# Altium PCB SmartUrometer_PCB.PcbDoc
Units mm, origin at the board's own origin, x right, y up, seen from the top; angles counter-clockwise.
Board outline 89.03 x 65.02 mm, 2 copper layers (Top Layer, Bottom Layer); 7 components, 8 nets, 56 pads, 4 vias.
Unrouted connection lines stored in the file: 2.
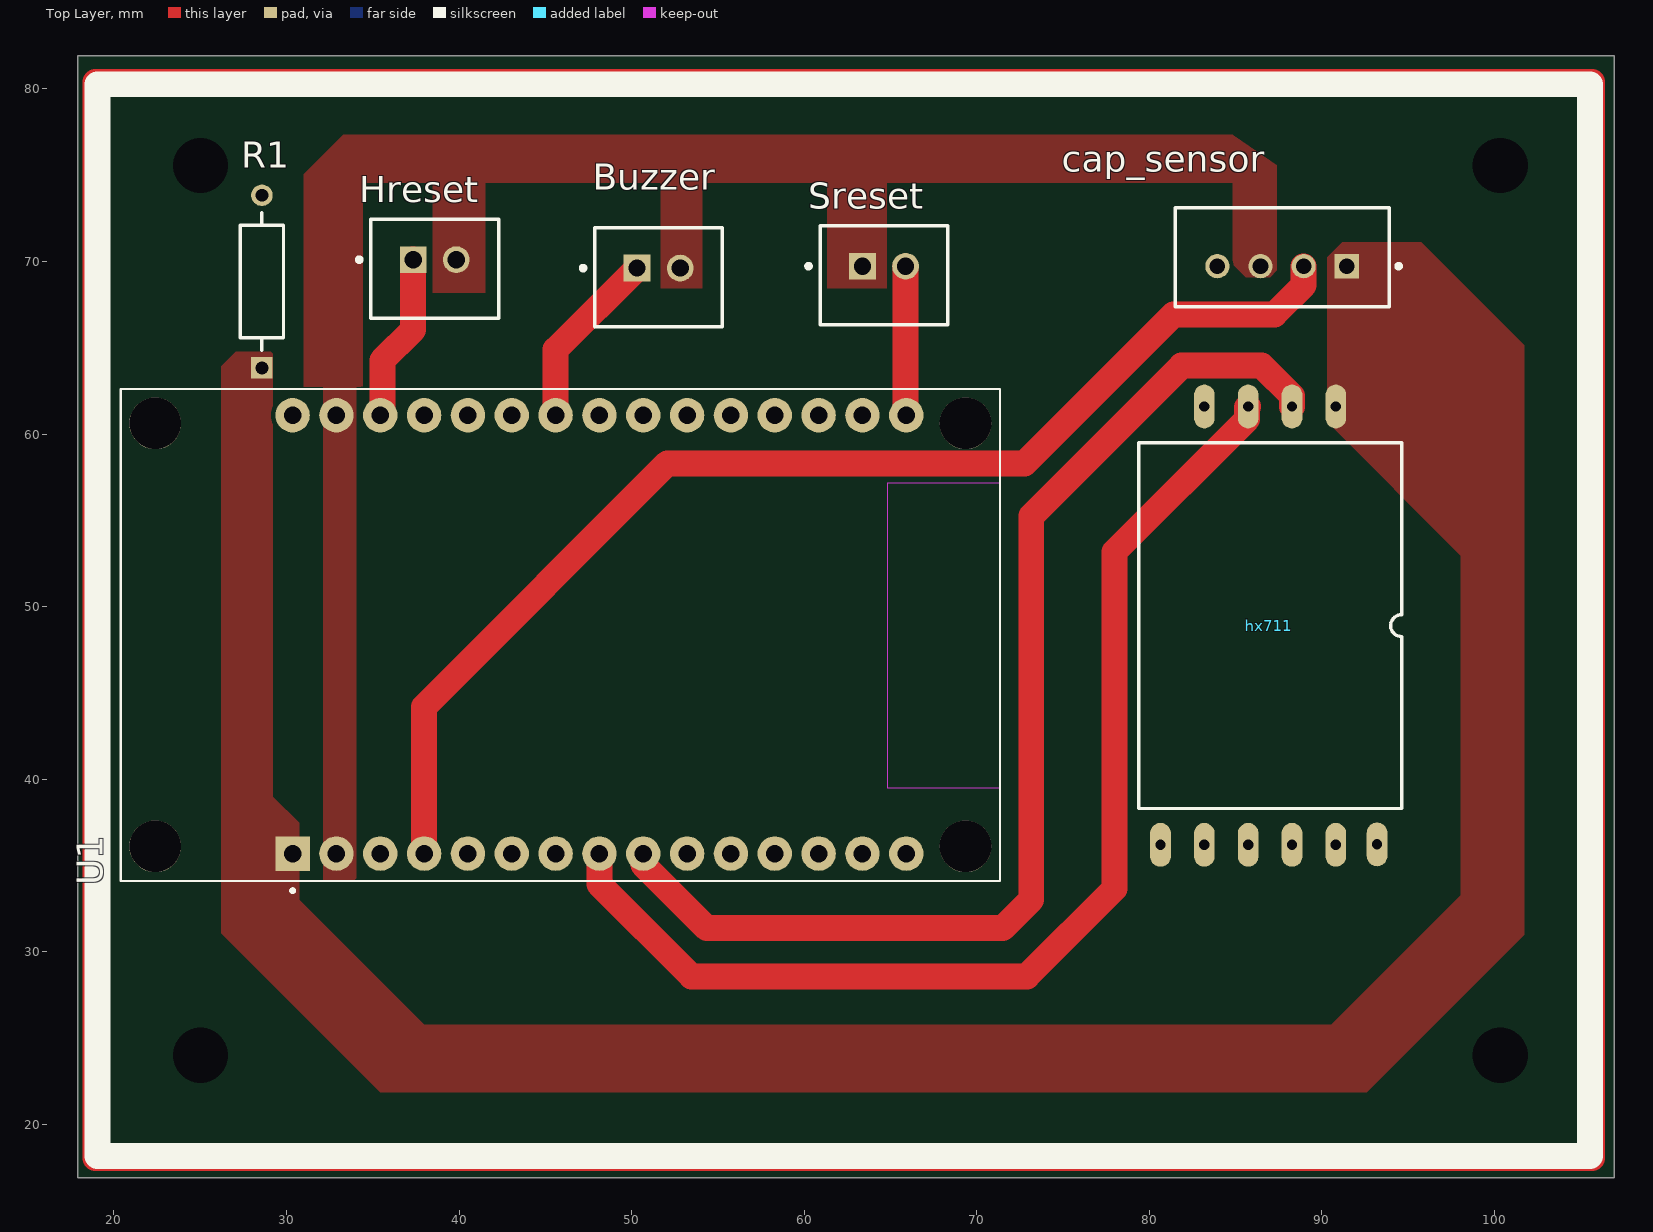
[diagram p0: Top Layer view]
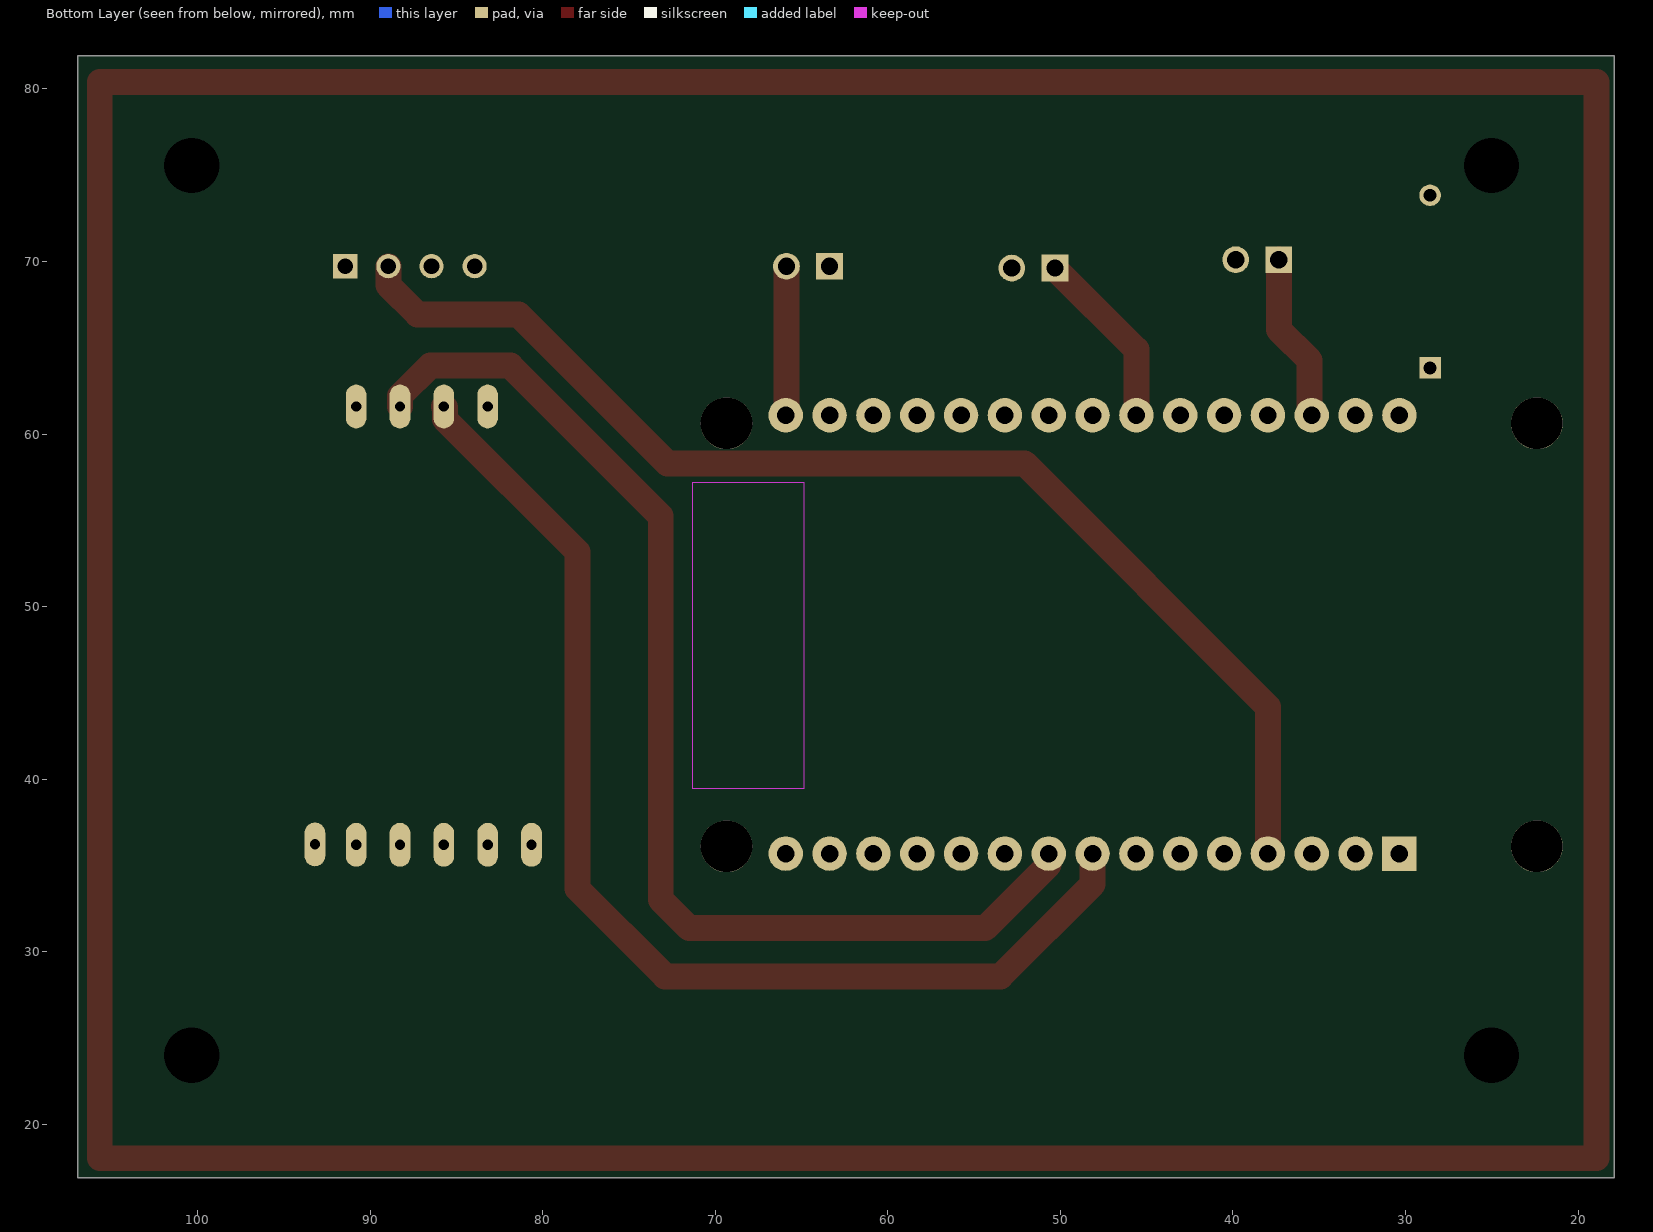
[diagram p1: Bottom Layer view, seen from below]
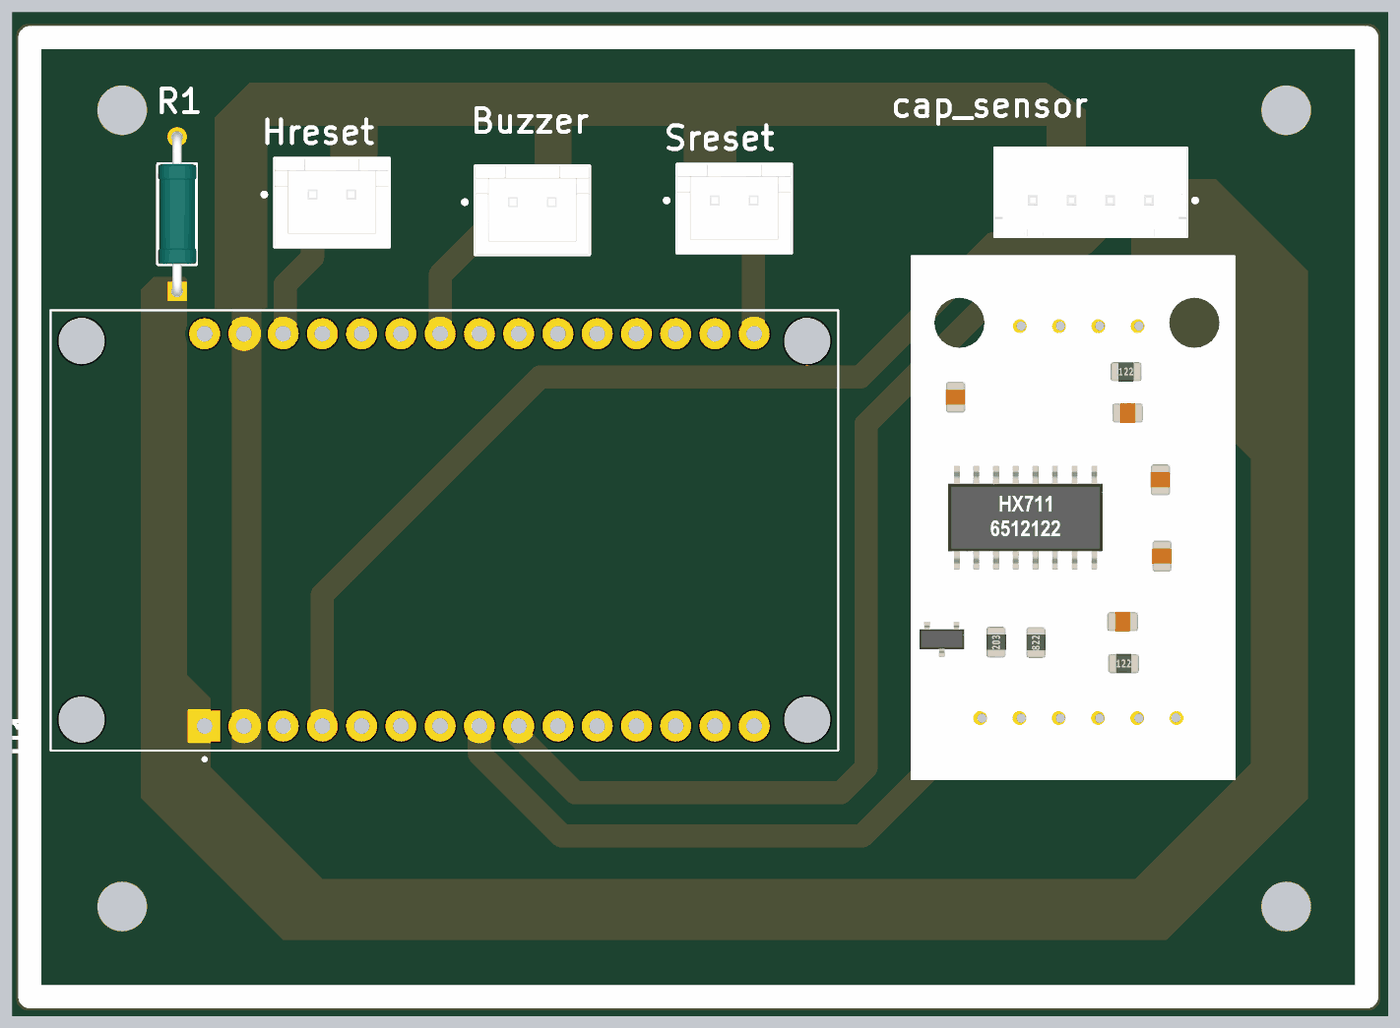
[diagram p2: 3D render of the assembled board from above, using the file's embedded part models]

## Layer stack, top to bottom
Top Solder: solder mask 0.0102, Solder Resist, Dk 3.5
Top Layer: signal copper 0.0356
Dielectric 1: dielectric 0.32, FR-4, Dk 4.8
Bottom Layer: signal copper 0.0356
Bottom Solder: solder mask 0.0102, Solder Resist, Dk 3.5

## Board outline
17.907,16.891 106.934,16.891 106.934,81.915 17.907,81.915

## Design rules (kind name [scope] priority, off if disabled: settings)
Clearance Clearance_1 [OnMid vs OnMid] p1: gap=0.254 ignorepadtopadclearanceinfootprint=FALSE sourcerule=37 cellrowname=All cellrowtype=0 cellcolname=All cellcoltype=0 innerlayers=TRUE
Clearance Clearance_2 [(ExistsOnLayer('Top Layer') Or ExistsOnLayer('Bottom Layer')) vs (ExistsOnLayer('Top Layer') Or ExistsOnLayer('Bottom Layer'))] p2: gap=0.254 ignorepadtopadclearanceinfootprint=FALSE sourcerule=37 cellrowname=All cellrowtype=0 cellcolname=All cellcoltype=0 outerlayers=TRUE
Clearance [All] p3: gap=0.254 ignorepadtopadclearanceinfootprint=FALSE ismatrix=TRUE
PolygonConnect PolygonConnect_1 [All vs IsPolygon] p1: connectstyle=Direct reliefconductorwidth=0.254 reliefentries=4 polygonreliefangle="90 Angle" airgapwidth=0.254
PolygonConnect [All] p2: connectstyle=Relief reliefconductorwidth=0.254 reliefentries=4 polygonreliefangle="90 Angle" airgapwidth=0.254
RoutingVias [All] p1: holewidth=0.711 width=1.27 viastyle="Through Hole" minholewidth=0.711 minwidth=1.27 maxholewidth=0.711 maxwidth=1.27
SolderMaskExpansion [All] p1: expansion=0.102 istentingtop=FALSE
Width [All] p1: maxlimit=1.5 minlimit=1.5 preferedwidth=1.5 minimp=50.000000 maximp=50.000000 favimp=50.000000
30 further rules are at their usual default settings.

## Classes and differential pairs
component class Sheet1: Buzzer cap_sensor Hreset hx711 R1 Sreset

## Components (designator, comment, footprint, x,y, rotation, side; value= is the part's Value field where it differs from the comment)
Buzzer "Buzzer" FP-B2B-XH-A_LF_SN-MFG 51.562,69.088 r0 top
cap_sensor "B4B-XH-A(LF)(SN)" FP-B4B-XH-A_LF_SN-MFG 87.69,70.248 r0 top
Hreset "B2B-XH-A(LF)(SN)" FP-B2B-XH-A_LF_SN-MFG 38.588,69.579 r0 top
hx711 "HX711" hX711 93.345,61.595 r270 top
R1 "MRS25000C1000FRP00" FP-MRS25-MFG 28.575,68.834 r90 top
Sreset "B2B-XH-A(LF)(SN)" FP-B2B-XH-A_LF_SN-MFG 64.623,69.198 r0 top
U1 "ESP32-DEVKIT-V1" MODULE_ESP32_DEVKIT_V1 45.868,48.387 r90 top

## Footprints (in the part's own frame and the unit in brackets; to place one, negate y for a bottom-side part, rotate by r counter-clockwise, add the part's x,y. Pads: shape width x height; smd on the part's side, far side on the other; paste and mask are expansions set on the pad)
FP-B2B-XH-A_LF_SN-MFG [mm]
  rect 1.55x1.55 hole 1 paste-2539.97 mask+0: 1(-1.25,0.525)
  round 1.55 hole 1 paste-2539.97 mask+0: 2(1.25,0.525)
  silkscreen extent -4.5,-2.87 3.7,2.88, body extent -3.8,-2.98 3.8,2.98, height 0.25
FP-B4B-XH-A_LF_SN-MFG [mm]
  rect 1.4x1.4 hole 0.9 paste-2539.97 mask+0: 1(3.75,-0.525)
  round 1.4 hole 0.9 paste-2539.97 mask+0: 2(1.25,-0.525) 3(-1.25,-0.525) 4(-3.75,-0.525)
  silkscreen extent -6.2,-2.87 6.87,2.88, body extent -6.3,-2.98 6.3,2.98, height 0.25
FP-MRS25-MFG [mm]
  rect 1.25x1.25 hole 0.75 paste-2539.97 mask+0: 1(-5,0)
  round 1.25 hole 0.75 paste-2539.97 mask+0: 2(5,0)
  silkscreen extent -3.97,-1.25 3.97,1.25, body extent -5.73,-1.35 5.73,1.35, height 0.25
hX711 [mm]
  oval 2.54x1.2 hole 0.6: 0(25.4,-12.7) 1(25.4,-10.16) 2(25.4,-7.62) 3(25.4,-5.08) 4(25.4,-2.54) 5(25.375,-0.152) 6(0,-10.16) 7(0,-7.62) 8(0,-5.08) 9(0,-2.54)
  silkscreen extent 2.1,-13.97 23.3,1.27, body extent -4.58,-17.3 29.42,3.7, height 1.97
MODULE_ESP32_DEVKIT_V1 [mm]
  rect 2x2 / inner round 2 / far side rect 2x2 hole 1.02: 1(-12.7,15.515)
  round 2 hole 1.02: 2(-12.7,12.975) 3(-12.7,10.435) 4(-12.7,7.895) 5(-12.7,5.355) 6(-12.7,2.815) 7(-12.7,0.275) 8(-12.7,-2.265) 9(-12.7,-4.805) 10(-12.7,-7.345) 11(-12.7,-9.885) 12(-12.7,-12.425) 13(-12.7,-14.965) 14(-12.7,-17.505) 15(-12.7,-20.045) 16(12.7,-20.045) 17(12.7,-17.505) 18(12.7,-14.965) 19(12.7,-12.425) 20(12.7,-9.885) 21(12.7,-7.345) 22(12.7,-4.805) 23(12.7,-2.265) 24(12.7,0.275) 25(12.7,2.815) 26(12.7,5.355) 27(12.7,7.895) 28(12.7,10.435) 29(12.7,12.975) 30(12.7,15.515)
  round 3 hole 3 unplated: ""(-12.28,23.475) ""(-12.28,-23.475) ""(12.23,23.475) ""(12.23,-23.475)
  Keep-Out Layer region: 8.78,-25.475 -8.91,-25.475 -8.91,-18.985 8.78,-18.985
  Keep-Out Layer region: 8.78,-25.475 -8.91,-25.475 -8.91,-18.985 8.78,-18.985
  silkscreen extent -14.95,-25.48 14.23,25.48

## Part data
Buzzer Hreset Sreset: library part CMP-2000-05888-3, "CONN HEADER VERT 2POS 2.5MM", Color=Natural, Contact Resistance=20mR, Current Rating=3A, Housing Color=White, Insulation Resistance=1GR, Max Operating Temperature=85°C, Max Voltage Rating (AC)=250V, Min Operating Temperature=-25°C, Connector Type="Male Pin", Contact Material=Brass, Contact Plating=Tin, Contact Type="Male Pin", Depth=5.75mm, Fastening Type=Detent, Housing Material=Polyamide, Lead Free="Lead Free", Lead Pitch=2.5mm, Length=7.4mm, Max Current Rating=3A, Max Voltage Rating (DC)=250V, Mount="Through Hole", Number of Contacts=2, Number of Positions=2, Number of Rows=1, Orientation=Straight, Packaging=Bulk, Pitch=2.5mm, REACH SVHC="No SVHC", Series=XH, Termination=Solder, Voltage Rating=250V, Voltage Rating (AC)=250V, Wire/Cable Gauge=22AWG
cap_sensor: library part CMP-17439-000250-1, "CONN HEADER VERT 4POS 2.5MM", Color=Natural, Contact Resistance=20mR, Current Rating=3A, Flammability Rating="UL94 V-0", Housing Color=White, Insulation Resistance=1GR, Max Operating Temperature=85°C, Max Voltage Rating (AC)=250V, Min Operating Temperature=-25°C, Package Quantity=500, Connector Type=Header, Contact Finish - Mating=TIN, Contact Material=Brass, Contact Plating=Tin, Contact Shape=Square, Contact Type="Male Pin", Depth=5.75mm, Fastening Type=Detent, Gender=Male, Housing Material=Polyamide, Insulation Color=Natural, Insulation Material=Nylon, Lead Free="Lead Free", Lead Pitch=2.5mm, Length=12.4mm, Mated Stacking Heights=9.8mm, Material=Polyamide, Max Current Rating=3A, Max Voltage Rating (DC)=250V, Mount="Through Hole", Number of Contacts=4, Number of Positions=4, Number of Rows=1, Orientation=Straight, Packaging=Bulk, Pitch=2.5mm, REACH SVHC="No SVHC", Series=XH, Termination=Solder, Voltage Rating=250V, Voltage Rating (AC)=250V, Wire/Cable Gauge=22AWG
R1: library part CMP-00030-42757237-1, "MRS25000C1000FRP00 Resistor, 100 Ohm, ± 1%, 600 mW, Axial Leaded, Metal Film (Thin Film), Professional", Case/Package=Axial, Max Operating Temperature=155°C, Max Power Dissipation=600mW, Min Operating Temperature=-55°C, Resistance=100Ω, Temperature Coefficient=50ppm/°C, Tolerance=1%, Voltage Rating=350V, Composition="Metal Film, Thin Film", Contact Plating=Tin, Diameter=2.5mm, Lead Diameter=600µm, Lead Free="Lead Free", Length=6.5mm, Military Standard=Not, Mount="Through Hole", NexarPartId=42757237, Number of Pins=2, Number of Terminations=2, Packaging="Tape & Reel (TR)", Power Rating=600mW, Radiation Hardening=No, REACH SVHC=Unknown, RoHS=Compliant, Schedule B="8533210090, 8533210090", Termination=Axial, Voltage Rating (DC)=350V, Width=2.5mm
U1: library part CMP-008-000000-1, "Dual core, Wi-Fi: 2.4 GHz up to 150 Mbits/s,BLE (Bluetooth Low Energy) and legacy Bluetooth, 32 bits, Up to 240 MHz", Package=None, Availability="Not in stock", Check_prices=https://www.snapeda.com/parts/ESP32-DEVKIT-V1/Do+it/view-part/?ref=eda, Component Type=Standard, Design Item ID=ESP32-DEVKIT-V1, MF="Do it", MP=ESP32-DEVKIT-V1, Pin Count=30, Price=None, SnapEDA_Link=https://www.snapeda.com/parts/ESP32-DEVKIT-V1/Do+it/view-part/?ref=snap, Source=ESP32-DEVKIT-V1.SchLib

## Via types
v1: diameter 0.6/0.6 (per signal layer), hole 3.2, Top Layer to Bottom Layer, 4 vias

## Nets (pads, with @x,y where several pads share a name; then routed paths per layer and width w, separated by ;. In a path a pad name is that pad's centre, name@x,y a point inside that pad or via, vN(x,y) a via of type N, cw(c..) or ccw(c..) an arc to the next point about the centre after c; other vN are vias at no path point)
3V3: cap_sensor.1 hx711.9 R1.1 U1.1
cs_trigger: cap_sensor.2 U1.4 | length 70.7
  Top Layer w1.5: U1.4 37.973,44.196 52.07,58.293 67.596,58.293 72.771,58.293 81.407,66.929 87.249,66.929 88.94,68.62 cap_sensor.2
Dout: hx711.7 U1.8 | length 67.1
  Top Layer w1.5: U1.8 48.133,33.909 53.467,28.575 72.902,28.575 77.978,33.651 77.978,53.178 85.66,60.86 85.66,61.53 hx711.7
GND: Buzzer.2 cap_sensor.3 Hreset.2 hx711.6 Sreset.1 U1.2 U1.29
NetBuzzer_1: Buzzer.1 U1.24 | length 10.5
  Top Layer w1.5: U1.24 45.593,64.897 45.596,64.897 Buzzer.1
NetHreset_1: Hreset.1 R1.2 U1.28 | length 9.8
  Top Layer w1.5: U1.28 35.56,61.214 35.56,64.262 37.338,66.04 Hreset.1
NetSreset_2: Sreset.2 U1.16 | length 8.7
  Top Layer w1.5: Sreset.2 65.873,61.127 U1.16
SCK: hx711.8 U1.9 | length 67.6
  Top Layer w1.5: U1.9 50.673,35.052 54.356,31.369 71.501,31.369 73.152,33.02 73.152,55.245 81.87,63.963 86.512,63.963 88.265,62.211 hx711.8
pads on no net: cap_sensor.4 hx711.0 hx711.1 hx711.2 hx711.3 hx711.4 hx711.5 U1. U1.3 U1.5 U1.6 U1.7 U1.10 U1.11 U1.12 U1.13 U1.14 U1.15 U1.17 U1.18 U1.19 U1.20 U1.21 U1.22 U1.23 U1.25 U1.26 U1.27 U1.30
copper on no net: | length 298.6
  Top Layer w1.5: 105.283,80.391 105.664,80.391 ; 105.664,80.391 18.923,80.391 18.923,18.034 105.664,18.034 105.664,80.391
  other v1: 25.019,24.003 100.33,24.003 25.019,75.565 100.33,75.565

## Polygon pours and split planes (outlines as drawn)
3V3 on Top Layer "3V3_L01_P006" (solid, pour order 6): 27.305,64.77 29.083,64.77 29.21,64.643 29.21,38.989 30.734,37.465 30.734,33.02 37.973,25.781 90.551,25.781 98.044,33.274 98.044,52.959 90.297,60.706 90.297,70.231 91.186,71.12 95.758,71.12 101.727,65.151 101.727,30.988 92.583,21.844 35.433,21.844 26.216,31.061 26.216,63.935 27.051,64.77
GND on Top Layer "GND_L01_P005" (solid, pour order 5): 32.131,62.865 32.131,34.163 34.036,34.163 34.036,34.29 34.036,62.865
GND on Top Layer "GND_L01_P004" (solid, pour order 4): 85.598,69.088 86.995,69.088 87.388,69.481 87.388,75.56 84.836,77.343 84.836,69.85
GND on Top Layer "GND_L01_P000" (solid, pour order 0): 33.274,77.343 30.988,75.057 30.988,62.738 34.29,62.738 34.417,62.611 34.417,74.549 86.614,74.549 86.614,75.565 84.836,77.343
GND on Top Layer "GND_L01_P001" (solid, pour order 1): 61.341,75.438 61.341,68.453 64.77,68.453 64.77,75.438
GND on Top Layer "GND_L01_P002" (solid, pour order 2): 51.689,75.311 51.689,68.453 54.102,68.453 54.102,75.311
GND on Top Layer "GND_L01_P003" (solid, pour order 3): 38.481,75.946 38.481,68.199 41.529,68.199 41.529,75.946

## Silkscreen, mask and mechanical layers (free items; w line width, h text height)
Top Overlay:
  lines w1.5: 19.05,18.161 105.537,18.161 105.537,80.264 19.05,80.264 19.05,18.161